# EAGLE board YogiBear (EAGLE 7.3.0)
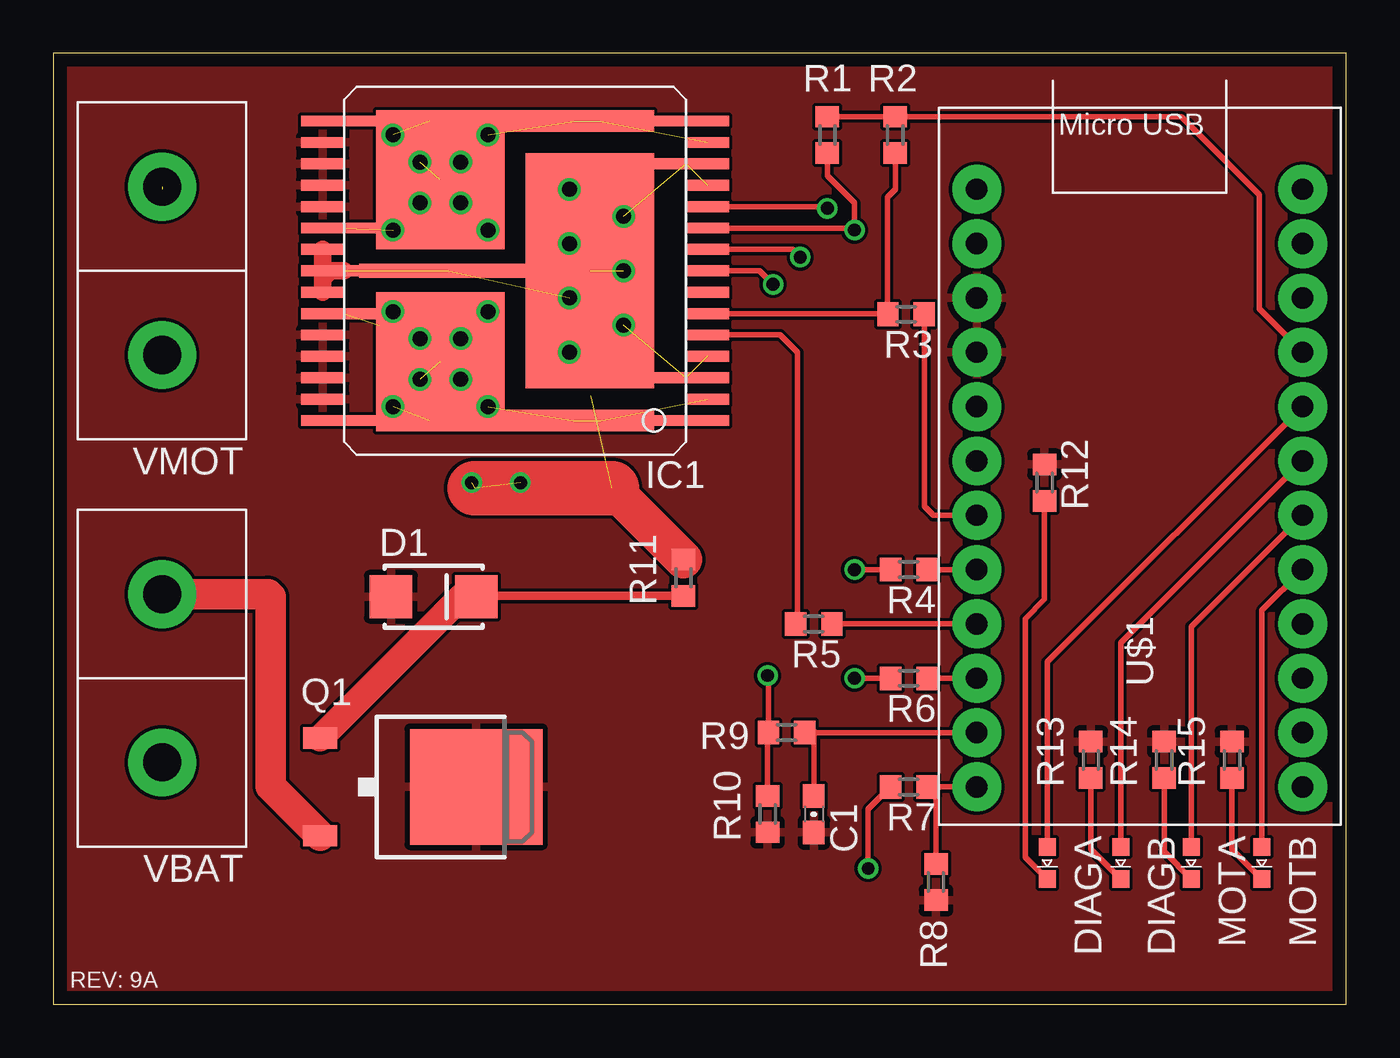
[diagram p0: board, top side]
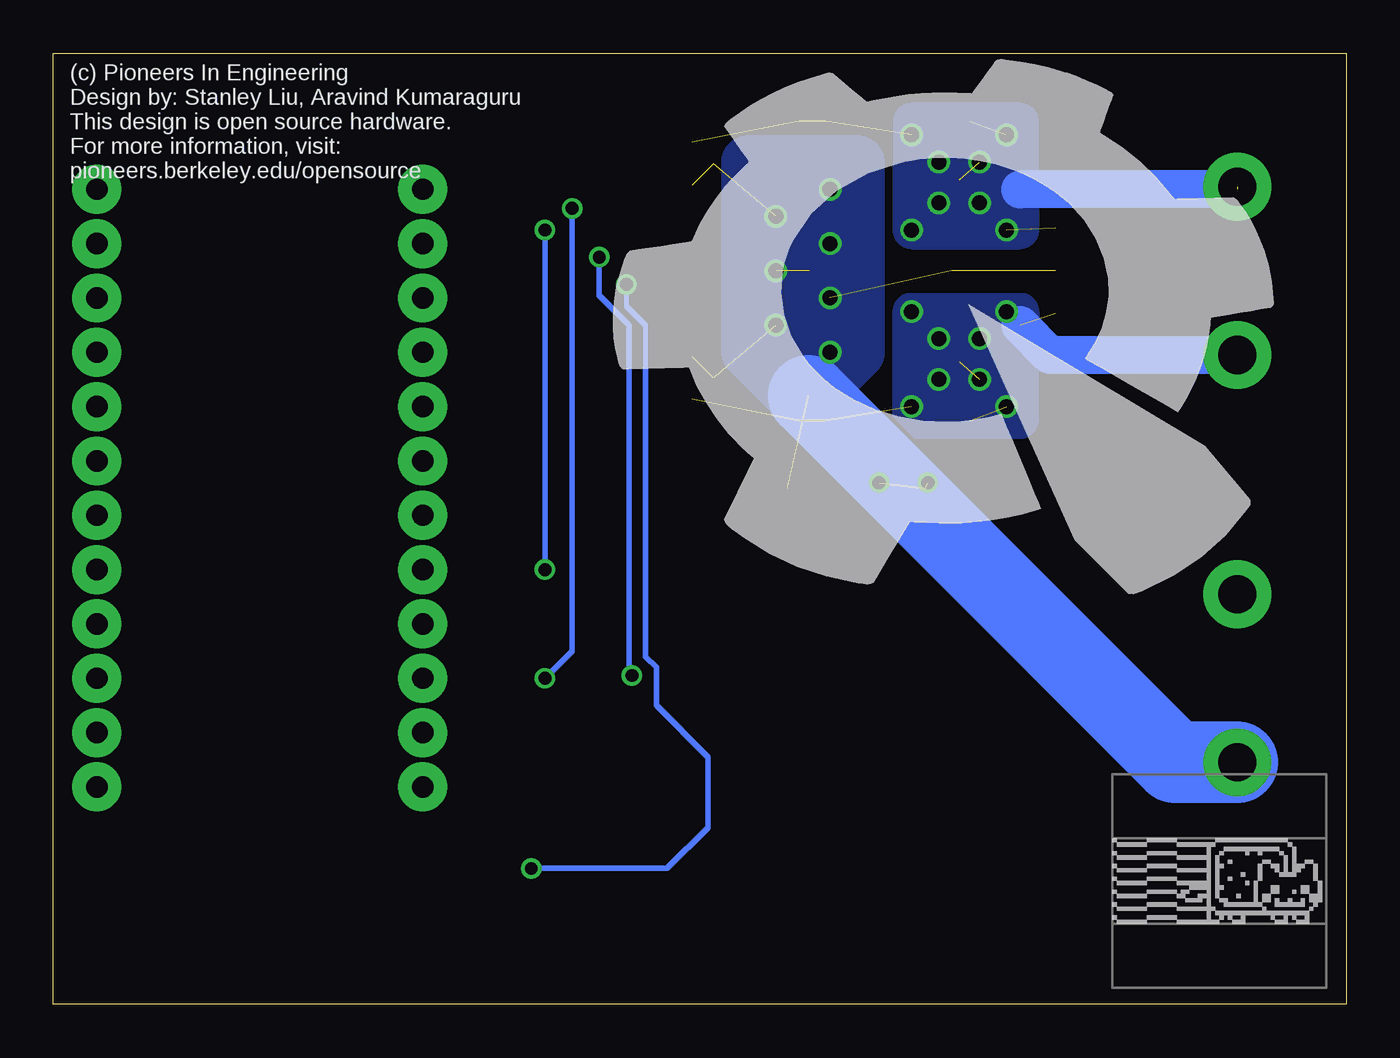
[diagram p1: board, bottom side, seen from below]

Size 60.45 x 44.45 mm. Coordinates in mm from the lower left corner, seen from the top.
Outline: 60.45,0 60.45,44.45 0,44.45 0,0 60.45,0
Copper layers (1*16): Top 2mil / dielectric 9mil / Bottom 2mil
Design rules "pie": minimum track width 6mil, minimum drill 15mil, track to track 6mil, track to pad 6mil, pad to pad 6mil, via to via 6mil, smd to smd 6mil, copper to edge 25mil, drill to drill 7mil, minimum pad ring 7mil, minimum via ring 7mil, stop-mask expansion 3mil, vias tented up to drill 21mil, thermal gap 10mil

## Footprints (pad centres in the part's own frame; a part is rotated, then mirrored left to right if it is on the bottom)
0603-CAP = smd 1.1 x 1: 1 -0.85,0; 2 0.85,0
SMA-DIODE_ALT = smd 2 x 2: A -2,0; C 2,0
LED-0603 = smd 0.8 x 0.8: A 0,-0.75; C 0,0.75
VNH2SP30 = smd 0.508 x 12: 1 -7,-4; 15 7,-4; 16 7,4; 30 -7,4 | smd 0.508 x 2: 2 -6,-9; 4 -4,-9; 5 -3,-9; 6 -2,-9; 7 -1,-9; 8 0,-9; 9 1,-9; 10 2,-9; 11 3,-9; 12 4,-9; 14 6,-9; 17 6,9; 18 5,9; 19 4,9; 20 3,9; 22 1,9; 24 -1,9; 26 -3,9; 27 -4,9; 28 -5,9; 29 -6,9; 31 -7,9 | smd 0.508 x 4: 3 -5,-8; 13 5,-8; 21 2,8; 23 0,8; 25 -2,8 | smd 6.5 x 6: OUTA -4.25,3.5; OUTB 4.25,3.5 | smd 1 x 7.5: OUTA@1 -7,-2.755; OUTB@1 7,-2.755 | smd 11 x 6: VCC 0,-3.5 | smd 0.65 x 8.3: VCC@1 0,3.145
TO252 = smd 1 x 1.6: 1 -2.28,-4.8; 2 2.28,-4.8 | smd 5.4 x 6.2: 3 0,2.5
R0603 = smd 1 x 1.1: 1 -0.85,0; 2 0.85,0
ARDUINO_PRO_MICRO = drill 1 pad 2.286: 2 1.27,19.05; 3 1.27,16.51; 4 1.27,13.97; 5 1.27,11.43; 6 1.27,8.89; 7 1.27,6.35; 8 1.27,3.81; 9 1.27,1.27; 10 16.51,1.27; 14 16.51,6.35; 15 16.51,8.89; 16 16.51,3.81; A0 16.51,11.43; A1 16.51,13.97; A2 16.51,16.51; A3 16.51,19.05; GND@0 1.27,24.13; GND@1 1.27,21.59; GND@2 16.51,26.67; RAW 16.51,29.21; RST 16.51,24.13; RXI 1.27,26.67; TXO 1.27,29.21; VCC 16.51,21.59
ANDERSON_VERTICAL = drill 1.778 pad 3.175: PIN1 0,-3.937; PIN2 0,3.937

## Placement (x,y rotation side)
C1  33 nF  [0603-CAP]  35.56,8.89 270 top
D1  [SMA-DIODE_ALT]  17.78,19.05 0 top
DIAGA  RED  [LED-0603]  46.48,6.6 180 top
DIAGB  YELLOW  [LED-0603]  49.91,6.6 180 top
IC1  VNH2SP30  [VNH2SP30]  21.59,34.29 90 top
MOTA  RED  [LED-0603]  53.21,6.6 180 top
MOTB  YELLOW  [LED-0603]  56.52,6.6 180 top
Q1  N-CHANNEL-MOSFETTO252  [TO252]  17.27,10.16 270 top
R1  4.7K  [R0603]  36.2,40.64 270 top
R2  4.7K  [R0603]  39.37,40.64 270 top
R3  1K  [R0603]  39.88,32.26 180 top
R4  1K  [R0603]  40.01,20.32 180 top
R5  1K  [R0603]  35.56,17.78 180 top
R6  1K  [R0603]  40.01,15.24 180 top
R7  1K\  [R0603]  40.01,10.16 180 top
R8  10K  [R0603]  41.27,5.71 90 top
R9  10K  [R0603]  34.29,12.7 0 top
R10  1.5K  [R0603]  33.4,8.89 90 top
R11  100K  [R0603]  29.46,19.94 90 top
R12  330  [R0603]  46.35,24.38 90 top
R13  330  [R0603]  48.51,11.43 90 top
R14  330  [R0603]  51.94,11.43 90 top
R15  330  [R0603]  55.12,11.43 90 top
U$1  ARDUINO_PRO_MICRO  [ARDUINO_PRO_MICRO]  41.91,8.89 0 top
U$2  [PIE-LOGO]  17.78,32.51 0 bottom
U$3  [NYAN-1CM]  10.92,0.76 0 bottom
VBAT  ANDERSONVERTICAL  [ANDERSON_VERTICAL]  5.08,15.24 180 top
VMOT  ANDERSONVERTICAL  [ANDERSON_VERTICAL]  5.08,34.29 180 top

## Library data of the parts
C1 = pie; PIE-INT-REF-NUM: CAPACITOR-GENERIC
D1 = pie; PIE-INT-REF-NUM: DIODE
DIAGA DIAGB MOTA MOTB = pie; PIE-INT-REF-NUM: LED
IC1 = pie; MPN: VNH3SP30-E; OC_FARNELL: 1739420; OC_NEWARK: 33R1486
Q1 U$1-U$3 = pie
R1-R15 = pie; PIE-INT-REF-NUM: RESISTOR-GENERIC
VBAT VMOT = pie; PIE-INT-REF-NUM: Anderson

## Nets
12V: IC1.3 IC1.4 IC1.12 IC1.13 IC1.22 IC1.23 IC1.24 IC1.VCC IC1.VCC@1 R11.2 VBAT.PIN2
BATGND: Q1.2 VBAT.PIN1
CS: IC1.9 R9.1 R10.2
CS/IO: C1.1 R9.2 U$1.8
DIAGA: IC1.6 R2.2 R3.2
DIAGA/IO: R3.1 U$1.4
DIAGB: IC1.10 R1.2 R4.2
DIAGB/IO: R4.1 U$1.5
GND: C1.2 D1.A IC1.17 IC1.18 IC1.19 IC1.20 IC1.26 IC1.27 IC1.28 IC1.29 Q1.3 R8.1 R10.1 R12.2 R13.2 R14.2 R15.2 U$1.GND@0 U$1.GND@1
INA: IC1.5 R5.2
INB: IC1.11 R6.2
LED1: DIAGA.A U$1.A3
LED2: DIAGB.A U$1.A2
LED3: MOTA.A U$1.A1
LED4: MOTB.A U$1.A0
MOTA/IO: R5.1 U$1.6
MOTB/IO: R6.1 U$1.7
N$2: D1.C Q1.1 R11.1
N$7: MOTB.C R15.1
N$8: MOTA.C R14.1
N$9: DIAGB.C R13.1
N$10: DIAGA.C R12.1
NC4: IC1.7
OUTA: IC1.1 IC1.2 IC1.25 IC1.30 IC1.OUTA IC1.OUTA@1 VMOT.PIN2
OUTB: IC1.14 IC1.15 IC1.16 IC1.21 IC1.OUTB IC1.OUTB@1 VMOT.PIN1
PWM: IC1.8 R7.2
PWM/IO: R7.1 R8.2 U$1.9
VCC: R1.1 R2.1 U$1.VCC

## Tracks (layer width: path | path; a pad name or v marks a point on that pad's centre or on a via)
12V  (via drill 0.6, 0.7)  (10 unrouted)
  Top 0.813: IC1.24 IC1.22 12.59,34.15 12.7,34.04 12.95,34.29 IC1.23
  Top 1.778: R11.2 26.12,24.13
  Top 2.54: 26.12,24.13 19.68,24.13
  Bottom 3.81: VBAT.PIN2 8,11.3 25.15,28.45
  other vias: 24.13,38.1 26.67,36.83 24.13,35.56 26.67,34.29 24.13,33.02 26.67,31.75 24.13,30.48 21.84,24.38 19.56,24.38
  pour Bottom: 25.4,27.94 27.94,30.48 27.94,39.37 22.86,39.37 22.86,30.48
BATGND
  Top 1.422: VBAT.PIN1 10.03,19.18 10.16,19.05 10.16,10.19 Q1.2
CS  (via drill 0.6)
  Top 0.254: v33.4,15.37 33.44,15.33 R9.1 33.4,12.66 R10.2 | IC1.9 34.56,35.29 v34.92,34.92
  Bottom 0.254: v34.92,34.92 34.92,33.15 33.53,31.75 33.53,15.49 v33.4,15.37
CS/IO
  Top 0.254: U$1.8 35.56,12.7 C1.1
  Top 0.406: R9.2 35.56,12.7
DIAGA
  Top 0.254: IC1.6 39,32.29 | 39,32.29 R3.2 | 39,32.29 39,37.73 39.37,38.1 R2.2
DIAGA/IO
  Top 0.254: R3.1 40.73,23.28 41.15,22.86 U$1.4
DIAGB  (via drill 0.6)
  Top 0.254: v37.47,20.32 R4.2 | IC1.10 37.37,36.29 v37.47,36.2 37.47,37.47 36.2,38.73 R1.2
  Bottom 0.254: v37.47,20.32 v37.47,36.2
DIAGB/IO
  Top 0.254: U$1.5 R4.1
GND
  pour Top: 0,0 60.45,0 60.45,44.45 0,44.45
INA
  Top 0.254: IC1.5 33.99,31.29 34.8,30.48 34.8,17.87 R5.2
INB  (via drill 0.6)
  Top 0.254: R6.2 v37.47,15.24 | IC1.11 36.12,37.29 v36.2,37.21
  Bottom 0.254: v36.2,37.21 36.2,16.51 v37.47,15.24
LED1
  Top 0.254: DIAGA.A 46.48,16 U$1.A3
LED2
  Top 0.254: DIAGB.A 49.91,16.89 U$1.A2
LED3
  Top 0.254: MOTA.A 53.21,17.65 U$1.A1
LED4
  Top 0.254: MOTB.A 56.52,18.41 U$1.A0
MOTA/IO
  Top 0.254: R5.1 U$1.6
MOTB/IO
  Top 0.254: R6.1 U$1.7
N$2
  Top 0.406: D1.C 19.82,19.09 R11.1
  Top 1.27: Q1.1 19.08,19.05 D1.C
N$7
  Top 0.254: R15.1 55.12,7.25 MOTB.C
N$8
  Top 0.254: R14.1 51.94,7.12 MOTA.C
N$9
  Top 0.254: R13.1 48.51,7.25 DIAGB.C
N$10
  Top 0.254: R12.1 46.35,18.92 45.47,18.03 45.47,6.87 DIAGA.C
OUTA  (via drill 0.7)  (6 unrouted)
  Bottom 1.778: VMOT.PIN2 13.84,30.35 15.24,31.75
  other vias: 15.88,32.38 17.14,31.11 19.05,31.11 19.05,29.21 20.32,32.38 20.32,27.94 17.14,29.21 15.88,27.94
  pour Bottom: 15.24,32.38 15.24,27.3 20.32,27.3 20.32,32.38
OUTB  (via drill 0.7)  (7 unrouted)
  Bottom 1.778: 5.08,38.1 15.24,38.1
  other vias: 15.88,40.64 17.14,39.37 19.05,39.37 20.32,40.64 19.05,37.47 17.14,37.47 15.88,36.2 20.32,36.2
  pour Bottom: 15.24,36.2 15.24,41.27 20.32,41.27 20.32,36.2
PWM  (via drill 0.6)
  Top 0.254: v38.1,6.35 38.1,9.11 R7.2 | IC1.8 33.02,34.29 v33.66,33.66
  Bottom 0.254: v38.1,6.35 31.75,6.35 29.84,8.26 29.84,11.56 32.26,13.97 32.26,15.75 32.77,16.26 32.77,31.75 33.66,32.64 v33.66,33.66
PWM/IO
  Top 0.254: U$1.9 R7.1 41.27,9.74 R8.2
VCC
  Top 0.254: R1.1 R2.1 52.74,41.49 56.39,37.85 56.39,32.51 U$1.VCC

## Text on the board
tPlace: REV: 9A
bPlace: (c) Pioneers In Engineering / Design by: Stanley Liu, Aravind Kumaraguru / This design is open source hardware. / For more information, visit: / pioneers.berkeley.edu/opensource